# Altium PCB BEAGLEPLAYV020_220915.brd.PcbDoc (part 11 of 12)
Units mil, origin at the board's own origin, x right, y up, seen from the top; angles counter-clockwise.
Board outline 3149.7 x 3149.7 mil, 8 copper layers (TOP, LYR2_GND, LYR3, LAY4_PWR1, LAY5_PWR2, LAY6, LYR7_GND, BOTTOM), stack 60.84 mil thick; 782 components, 546 nets, 2864 pads, 2056 vias.
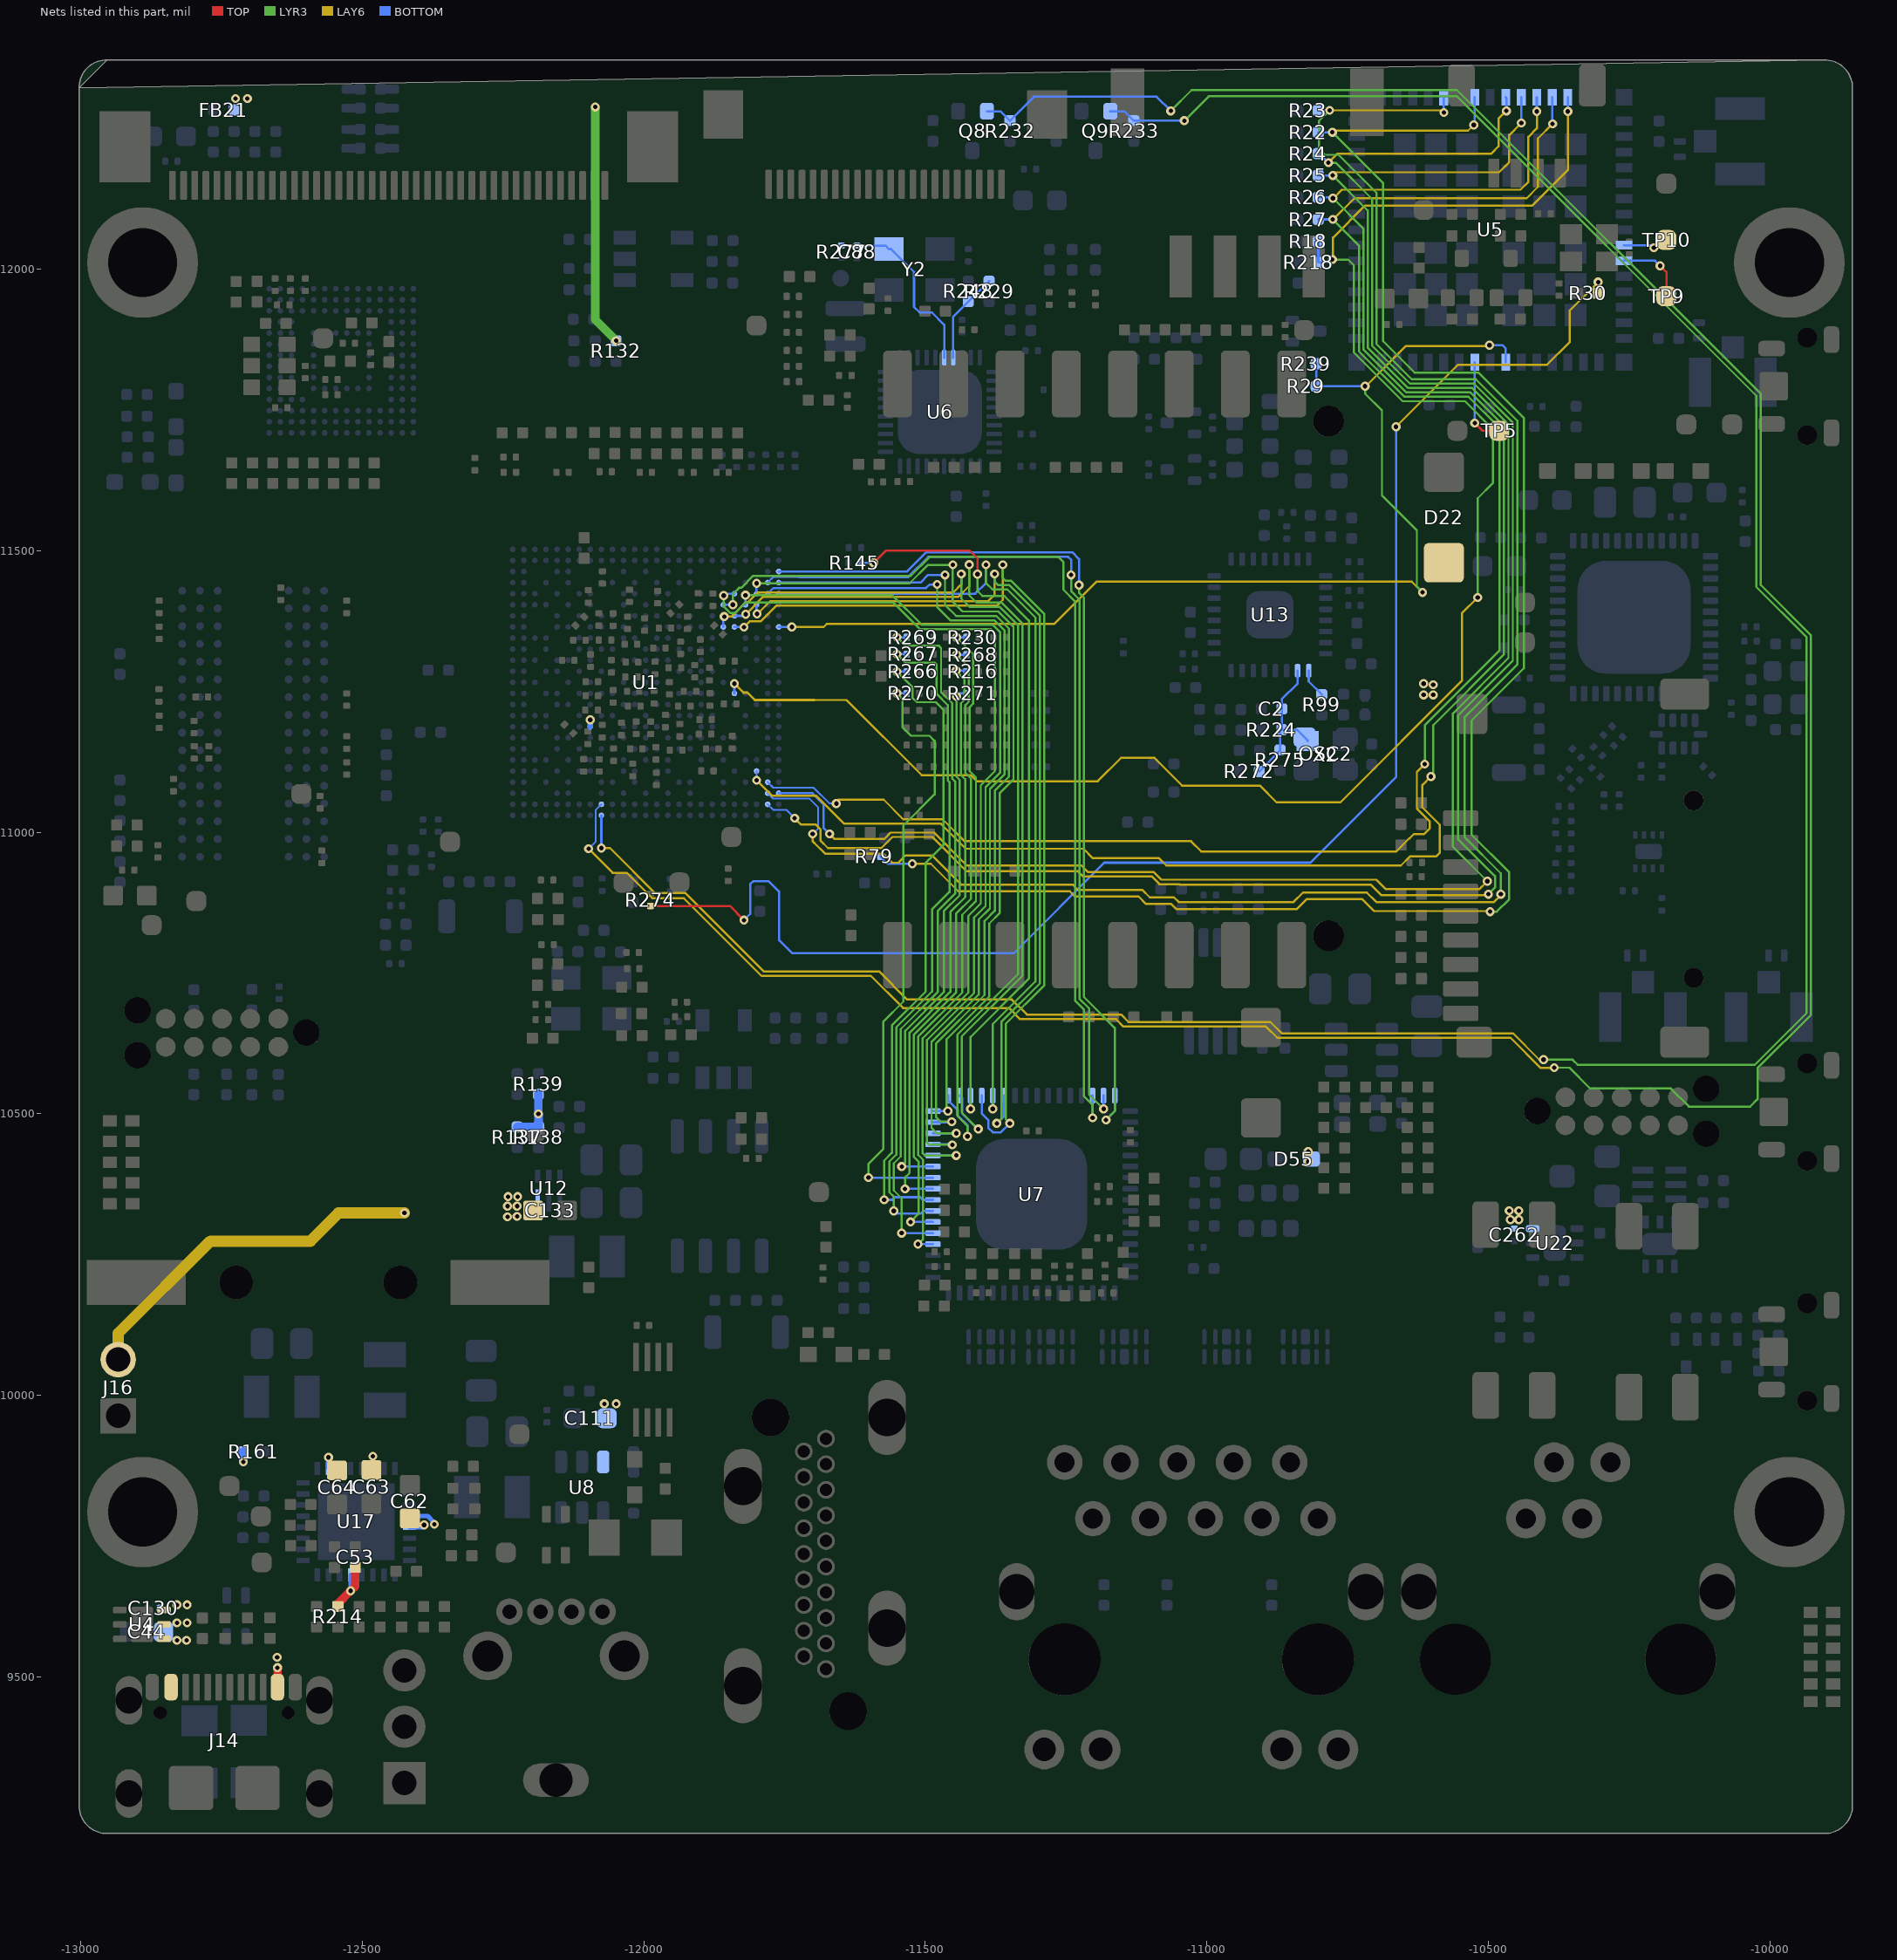
[diagram p17: the nets of this part, all layers, seen from the top]

## Via types
v1: diameter 16/0/16/0/0/0/0/16 (per signal layer), hole 8, TOP to BOTTOM, 334 vias
v2: diameter 16/16/0/0/0/0/16/16 (per signal layer), hole 8, TOP to BOTTOM, 282 vias
v3: diameter 16/0/0/0/0/16/0/16 (per signal layer), hole 8, TOP to BOTTOM, 255 vias
v4: diameter 16/16/0/0/0/16/16/16 (per signal layer), hole 8, TOP to BOTTOM, 253 vias
v5: diameter 16, hole 8, TOP to BOTTOM, 212 vias
v6: diameter 16/16/16/0/0/16/16/16 (per signal layer), hole 8, TOP to BOTTOM, 173 vias
v7: diameter 16/0/0/16/0/0/0/16 (per signal layer), hole 8, TOP to BOTTOM, 131 vias
v8: diameter 16/0/0/0/16/0/0/16 (per signal layer), hole 8, TOP to BOTTOM, 98 vias
v9: diameter 16/16/0/16/0/0/16/16 (per signal layer), hole 8, TOP to BOTTOM, 93 vias
v10: diameter 16/0/16/0/0/16/0/16 (per signal layer), hole 8, TOP to BOTTOM, 87 vias
v11: diameter 16/16/0/16/0/16/16/16 (per signal layer), hole 8, TOP to BOTTOM, 44 vias
v12: diameter 16/16/16/16/0/16/16/16 (per signal layer), hole 8, TOP to BOTTOM, 40 vias
v13: diameter 16/16/16/0/0/0/16/16 (per signal layer), hole 8, TOP to BOTTOM, 19 vias
v14: diameter 16/0/0/16/0/16/0/16 (per signal layer), hole 8, TOP to BOTTOM, 15 vias
v15: diameter 16/0/0/0/16/16/0/16 (per signal layer), hole 8, TOP to BOTTOM, 13 vias
v16: diameter 16/0/16/0/16/0/0/16 (per signal layer), hole 8, TOP to BOTTOM, 3 vias
v17: diameter 16/0/16/16/0/0/0/16 (per signal layer), hole 8, TOP to BOTTOM, 3 vias
v18: diameter 16/16/16/16/0/0/16/16 (per signal layer), hole 8, TOP to BOTTOM, 1 vias

## Nets (pads, with @x,y where several pads share a name; then routed paths per layer and width w, separated by ;. In a path a pad name is that pad's centre, name@x,y a point inside that pad or via, vN(x,y) a via of type N, cw(c..) or ccw(c..) an arc to the next point about the centre after c; other vN are vias at no path point) (continued)
VOUT0_D6: U1.Y23 U7.54 | length 1596.1
  LYR3 w3.8: v10(-11376.9,11458.6) -11376.9,11444.9 -11371.2,11439.2 -11351.38,11439.2 -11296.4,11384.22 -11296.4,10731.88 -11364.8,10663.48 -11364.8,10661.2 -11365,10661 -11365,10491 v1(-11373,10483)
  LAY6 w3.8: -11697,11410.5 -11388.4,11410.5 -11376.9,11422 v10(-11376.9,11458.6)
  LAY6 w4: v3(-11798.91,11387.84) -11797.84,11387.84 -11775.18,11410.5 -11697,11410.5
  BOTTOM w4: U1.Y23@-11799.65,11404 -11799.65,11389.65 -11799,11389 -11799,11387.93 v3(-11798.91,11387.84) ; v1(-11373,10483) -11360.44,10495.56 U7.54@-11360.44,10532.4
VOUT0_D7: U1.AA25 U7.53 | length 1481.3
  LYR3 w3.8: v1(-11392.3,11474.9) -11392.3,11442.7 -11381,11431.4 -11354.62,11431.4 -11304.2,11380.98 -11304.2,10735.12 -11380.13,10659.19 v1(-11380.13,10508.72)
  BOTTOM w4: U1.AA25@-11760.28,11423.68 -11411.32,11423.68 -11392.3,11442.7 v1(-11392.3,11474.9) ; v1(-11380.13,10508.72) U7.53@-11380.13,10532.4
VOUT0_D8: U1.V21 U7.52 | length 1728.6
  LYR3 w3.8: v10(-11362.4,11474.9) -11362.4,11451.66 -11357.74,11447 -11348.14,11447 -11288.6,11387.46 -11288.6,10728.64 -11357,10660.24 -11357,10490 v1(-11350,10483)
  LAY6 w3.8: -11697,11402.7 -11372.3,11402.7 -11362.4,11412.6 v10(-11362.4,11474.9)
  LAY6 w4: v3(-11822.12,11364.32) -11811.8,11374.64 -11792.35,11374.64 -11764.29,11402.7 -11697,11402.7
  BOTTOM w4: U1.V21@-11839.02,11364.62 -11822.63,11364.62 -11822.33,11364.32 v3(-11822.12,11364.32) ; U7.52@-11399.81,10532.4 -11399.81,10500.81 -11388,10489 -11388,10475 -11380,10467 -11366,10467 v1(-11350,10483)
VOUT0_D9: U1.W21 U7.50 | length 1674.4
  LYR3 w3.8: v10(-11422.1,11475.2) -11422.1,11464.68 -11422.2,11464.58 -11422.2,11421.2 -11408.8,11407.8 -11364.4,11407.8 -11327.8,11371.2 -11327.8,10744.9 -11435.2,10637.5 -11435.2,10502.2 v1(-11406,10473)
  LAY6 w3.8: -11697,11418.3 -11441.2,11418.3 -11422.1,11437.4 v10(-11422.1,11475.2)
  LAY6 w4: v3(-11819,11387) -11787.7,11418.3 -11697,11418.3
  BOTTOM w4: U1.W21@-11839.02,11384.31 -11824.69,11384.31 -11822,11387 v3(-11819,11387) ; U7.50@-11439.18,10532.4 -11434.5,10527.72 -11434.5,10500.5 -11409,10475 -11408,10475 v1(-11406,10473)
VOUT0_D10: U1.V20 U7.49 | length 1692.1
  LYR3 w3.8: v10(-11436.1,11458.6) -11436,11458.5 -11436,11415 -11421,11400 -11367.64,11400 -11335.6,11367.96 -11335.6,10748.14 -11443,10640.74 -11443,10496 -11425,10478 v1(-11425,10460)
  LAY6 w3.8: -11697,11426.1 -11449.9,11426.1 -11436.1,11439.9 v10(-11436.1,11458.6)
  LAY6 w4: v3(-11857.1,11382.96) -11844.04,11382.96 -11818.1,11408.9 -11814.36,11408.9 -11797.16,11426.1 -11697,11426.1
  BOTTOM w4: U1.V20@-11858.7,11364.62 -11858.7,11381.36 v3(-11857.1,11382.96) ; U7.49@-11458.87,10532.4 -11458.87,10523.49 -11442.5,10507.12 -11442.5,10497.18 -11425,10479.68 v1(-11425,10460)
VOUT0_D11: U1.AA23 U7.48 | length 1508.7
  LYR3 w3.8: -11697,11442.1 -11528.12,11442.1 -11495.32,11474.9 v1(-11451.1,11474.9) -11451.1,11409.1 -11434.1,11392.1 -11370.78,11392.1 -11343.4,11364.72 -11343.4,11094 -11367.7,11069.7 -11367.7,10856.7 -11386.39,10838.01 -11386.39,10708.39 -11462,10632.78 -11462,10506.82 v1(-11460.02,10504.84)
  LYR3 w4: v1(-11799.65,11442.1) -11697,11442.1
  BOTTOM w4: U1.AA23@-11799.65,11423.68 v1(-11799.65,11442.1) ; U7.48@-11486.43,10504.84 v1(-11460.02,10504.84)
VOUT0_D12: U1.AB25 U7.47 | length 1471.8
  LYR3 w3.8: v1(-11465,11457) -11465,11404 -11445.3,11384.3 -11374.02,11384.3 -11351.2,11361.48 -11351.2,11099 -11376.6,11073.6 -11376.6,10860.6 -11394.91,10842.29 -11394.91,10710.91 -11481.2,10624.62 -11481.2,10494.2 -11473,10486 v1(-11453,10486)
  BOTTOM w4: U1.AB25@-11760.28,11443.36 -11508.64,11443.36 -11495,11457 v1(-11465,11457) ; U7.47@-11486.43,10485.15 -11453.85,10485.15 v1(-11453,10486)
VOUT0_D13: U1.AA24 U7.46 | length 1511.5
  LYR3 w3.8: v1(-11478.9,11440) -11478.9,11399.9 -11455.5,11376.5 -11377.26,11376.5 -11359,11358.24 -11359,11102.96 -11385.2,11076.76 -11385.2,10864.8 -11404.93,10845.07 -11404.93,10711.93 -11489,10627.86 -11489,10475 -11479.47,10465.47 v1(-11445,10465.47)
  BOTTOM w3.2: U1.AA24@-11779.96,11423.68 -11770.08,11433.56 -11722.24,11433.56
  BOTTOM w4: -11722.24,11433.56 -11498.86,11433.56 -11492.42,11440 v1(-11478.9,11440) ; U7.46@-11486.43,10465.47 v1(-11445,10465.47)
VOUT0_D14: U1.Y22 U7.45 | length 1537.9
  LYR3 w3.8: -11697,11420.9 -11558.66,11420.9 -11506.46,11368.7 -11380.5,11368.7 -11366.8,11355 -11366.8,11106.2 -11393,11080 -11393,10869 -11413.45,10848.55 -11413.45,10714.45 -11496.8,10631.1 -11496.8,10448.8 -11493,10445 v1(-11452,10445)
  LYR3 w4: v1(-11819.34,11420.9) -11697,11420.9
  BOTTOM w4: U1.Y22@-11819.34,11404 v1(-11819.34,11420.9) ; U7.45@-11486.43,10445.78 -11458.78,10445.78 -11458,10445 v1(-11452,10445)
VOUT0_D15: U1.AA21 U7.44 | length 1635.9
  LYR3 w3.8: -11697,11407.7 -11556.5,11407.7 -11509.7,11360.9 -11383.74,11360.9 -11376,11353.16 -11376,11109 -11401.5,11083.5 -11401.5,10873.5 -11423.47,10851.53 -11423.47,10715.47 -11504.6,10634.34 -11504.6,10429.9 -11500.8,10426.1 v1(-11445,10426.1)
  LYR3 w4: v1(-11857.97,11420.49) -11857.97,11400.81 -11846.58,11389.42 -11837.58,11389.42 -11819.3,11407.7 -11697,11407.7
  BOTTOM w3.8: v1(-11857.97,11420.49) -11857.51,11420.49 -11854.32,11423.68 U1.AA21@-11839.02,11423.68
  BOTTOM w4: U7.44@-11486.43,10426.1 v1(-11445,10426.1)
VOUT0_D16: R271.2 U7.43 | length 955.3
  LYR3 w3.8: v1(-11541.9,10406.41) -11535.8,10412.51 -11535.8,10647.3 -11467.05,10716.05 -11467.05,10859.95 -11439,10888 -11439,11093.16 -11444.46,11098.62 -11444.46,11238.46 -11444.67,11238.67 v1(-11444.67,11241.33)
  BOTTOM w4: v1(-11541.9,10406.41) U7.43@-11486.43,10406.41 ; v1(-11444.67,11241.33) -11443.67,11241.33 -11438.36,11246.64 R271.2@-11426.96,11246.64
VOUT0_D17: R270.2 U7.42 | length 1087.4
  LYR3 w3.8: v1(-11600.8,10386.73) -11600.8,10411.33 -11574.8,10437.33 -11574.8,10663.5 -11539,10699.3 -11539,11012 -11483.46,11067.54 -11483.46,11162.32 -11492.5,11171.36 -11525.36,11171.36 -11540.8,11186.8 -11540.8,11237.04 v1(-11550.4,11246.64)
  BOTTOM w4: v1(-11600.8,10386.73) U7.42@-11486.43,10386.73 ; v1(-11550.4,11246.64) R270.2@-11532.9,11246.64
VOUT0_D18: R216.2 U7.41 | length 1044.6
  LYR3 w3.8: v1(-11536,10366.81) -11536,10387 -11528,10395 -11528,10644.06 -11455.53,10716.53 -11455.53,10858.47 -11429,10885 -11429,11094.2 -11436.66,11101.86 -11436.66,11229 -11430.56,11235.1 -11430.56,11271.4 -11445,11285.84 v1(-11445,11287)
  BOTTOM w4: v1(-11536,10366.81) -11535.77,10367.04 U7.41@-11486.43,10367.04 ; v1(-11445,11287) -11428.66,11287 R216.2@-11426.96,11285.3
VOUT0_D19: R266.2 U7.40 | length 1143.5
  LYR3 w3.8: v1(-11573,10347.36) -11573,10417.05 -11559.2,10430.85 -11559.2,10657.02 -11499.11,10717.11 -11499.11,10945.89 -11467.86,10977.14 -11467.86,11217.86 -11481,11231 -11515,11231 -11523,11239 -11523,11257.9 v1(-11550.4,11285.3)
  BOTTOM w4: v1(-11573,10347.36) -11558.64,10347.36 -11554,10352 -11509,10352 -11504.36,10347.36 U7.40@-11486.43,10347.36 ; v1(-11550.4,11285.3) R266.2@-11532.9,11285.3
VOUT0_D20: R267.2 U7.39 | length 1196
  LYR3 w3.8: v1(-11555.9,10327.67) -11555.9,10352.86 -11563.8,10360.76 -11563.8,10415.21 -11551.4,10427.61 -11551.4,10653.78 -11488.09,10717.09 -11488.09,10862.91 -11457,10894 -11457,11089.08 -11460.06,11092.14 -11460.06,11226.02 -11480,11245.96 -11480,11297.6 -11483.8,11301.4 -11535.5,11301.4 v1(-11550.4,11316.3)
  BOTTOM w4: v1(-11555.9,10327.67) -11551.23,10323 -11508,10323 -11503.33,10327.67 U7.39@-11486.43,10327.67 ; v1(-11550.4,11316.3) R267.2@-11532.9,11316.3
VOUT0_D21: R268.2 U7.38 | length 1131.5
  LYR3 w3.8: v1(-11526.3,10307.99) -11512,10322.29 -11512,10415.22 -11520.2,10423.42 -11520.2,10640.82 -11445.01,10716.01 -11445.01,10855.99 -11419,10882 -11419,11095.24 -11428.86,11105.1 -11428.86,11225.76 -11422.76,11231.86 -11422.76,11293.6 v1(-11444.46,11315.3)
  BOTTOM w4: v1(-11526.3,10307.99) U7.38@-11486.43,10307.99 ; v1(-11444.46,11315.3) R268.2@-11426.96,11315.3
VOUT0_D22: R269.2 U7.37 | length 1259.6
  LYR3 w3.8: v1(-11550.4,11346.3) -11535.1,11331 -11475.8,11331 -11472,11327.2 -11472,11249 -11452.26,11229.26 -11452.26,11095.38 -11447,11090.12 -11447,10891.04 -11474.85,10863.19 ; v1(-11542,10288.3) -11542,10350 -11556,10364 -11556,10411.97 -11543.6,10424.37 -11543.6,10650.54 -11478.07,10716.07 -11478.07,10859.93 -11474.85,10863.15
  BOTTOM w4: v1(-11550.4,11346.3) R269.2@-11532.9,11346.3 ; v1(-11542,10288.3) U7.37@-11486.43,10288.3
VOUT0_D23: R230.2 U7.36 | length 1190.3
  LYR3 w3.8: v1(-11512.97,10268.82) -11504,10277.79 -11504,10418.26 -11512.4,10426.66 -11512.4,10637.58 -11434.49,10715.49 -11434.49,10853.51 -11410,10878 -11410,11097.28 -11421.06,11108.34 -11421.06,11222.52 -11414.96,11228.62 -11414.96,11316.6 v1(-11444.46,11346.1)
  BOTTOM w4: v1(-11512.97,10268.82) -11512.77,10268.62 U7.36@-11486.43,10268.62 ; v1(-11444.46,11346.1) R230.2@-11426.96,11346.1
VOUT0_DE: U1.Y20 U7.62 | length 1702.2
  LYR3 w3.8: -11697,11455.3 -11526.1,11455.3 -11492.3,11489.1 -11263.7,11489.1 -11255,11480.4 -11255,11431.14 -11234,11410.14 -11234,10701.08 -11218,10685.08 -11218,10531 -11203,10516 ; v1(-11202.96,10493) -11202.96,10516
  LYR3 w4: v1(-11841.8,11404) -11841.8,11423.2 -11830.9,11434.1 -11826.9,11434.1 -11805.7,11455.3 -11697,11455.3
  BOTTOM w4: U1.Y20@-11858.7,11404 v1(-11841.8,11404) ; v1(-11202.96,10493) U7.62@-11202.96,10532.4
VOUT0_HSYNC: U1.AB24 U7.63 | length 1583.2
  LYR3 w3.8: v1(-11241.1,11457) -11241.1,11428.28 -11226.2,11413.38 -11226.2,10704.32 -11209,10687.12 -11209,10534 -11183.72,10508.72 v1(-11183.28,10508.72)
  BOTTOM w3.2: U1.AB24@-11779.96,11443.36 -11770.07,11453.25 -11724,11453.25
  BOTTOM w4: -11724,11453.25 -11530.75,11453.25 -11494.8,11489.2 -11246.3,11489.2 -11241.1,11484 v1(-11241.1,11457) ; v1(-11183.28,10508.72) U7.63@-11183.28,10532.4
VOUT0_PCLK: R145.1 U7.51 | length 1326.9
  TOP w3.8: -11421,11500 -11407.2,11486.2 -11407.2,11458.5 v1(-11407.3,11458.4)
  TOP w4: v5(-11591.44,11478.56) -11570,11500 -11421,11500
  LYR3 w3.8: v1(-11419.5,10508.72) -11419.5,10636.51 -11316,10740.01 -11316,11376.09 -11359.51,11419.6 -11398.6,11419.6 -11407.3,11428.3 v1(-11407.3,11458.4)
  BOTTOM w4: R145.1@-11614.76,11478.56 v5(-11591.44,11478.56) ; v1(-11419.5,10508.72) U7.51@-11419.5,10532.4
VOUT0_VSYNC: U1.AC25 U7.64 | length 1630.9
  LYR3 w3.8: v1(-11227,11439) -11227,11425.22 -11218.4,11416.62 -11218.4,10707.56 -11163.59,10652.75 -11163.59,10504.41 v1(-11179,10489)
  BOTTOM w4: U1.AC25@-11760.28,11463.05 -11532.27,11463.05 -11498.12,11497.2 -11239.2,11497.2 -11227,11485 v1(-11227,11439) ; v1(-11179,10489) -11170.81,10497.19 -11170.81,10497.62 -11163.59,10504.84 U7.64@-11163.59,10532.4
VPP_1V8: J16.2 U1.J8 | length 655.7
  LAY6 w20: J16.2@-12933.34,10063.66 -12933.34,10110.16 -12769.5,10274 -12592,10274 -12542,10324 v10(-12425,10324)
  BOTTOM w10: U1.J8@-12094.92,11187.46 v1(-12094.92,11199.7)
VSYS_5V: C44.1 C53.1 C62.1 C63.1 C64.1 C111.1 C130.1 C133.1 C262.1 D22.1 D55.1 FB21.1 J14.B4 J14.B9 R132.2 R137.1 R138.1 R139.1 R161.1 R214.1 U4.4 U4.5 U4.6 U8.3 U12.6 U17.4 U17.5 U17.13 U17.26 U17.30 U22.6 | length 811.6
  TOP w15: J14.B4@-12650.51,9481.97 v7(-12650.51,9516.51) ; R214.1@-12543.14,9625.13 -12543.14,9630.39 v7(-12520.53,9653) -12512.34,9661.19 C53.1@-12512.34,9694.63
  LYR3 w15: v17(-12086,12288) -12086,11910 -12049.13,11873.13 v1(-12049.13,11872.83)
  BOTTOM w8: U17.26@-12559.9,9870.29 v7(-12559.9,9889.9) ; v7(-12520.53,9653) U17.13@-12520.53,9681.31 ; U17.30@-12481.16,9870.29 v7(-12481.16,9892) ; U17.5@-12416.2,9765.96 -12394.04,9765.96 v7(-12390,9770) ; U17.4@-12416.2,9785.64 -12383.71,9785.64 -12372,9773.93 v7(-12372,9771)
  BOTTOM w15: v7(-12711.21,9881.79) R161.1@-12711.21,9900 ; R137.1@-12224.86,10476.65 -12224.82,10476.61 R138.1@-12186.86,10476.61 -12186.86,10499.72 v7(-12187.14,10500) R139.1@-12187.14,10535.09
  other v7: -12651,9535 -12829,9565 -12812,9565 -12829,9596 -12811,9596 -12829,9628 -12811,9628 -12070,9985 -12049,9985 -10461,10312 -10446,10312 -12242,10317 -12225,10318 -10463,10328 -10446,10328 -12242,10336 -12225,10336 -12241,10353 -12224,10353 -10820,10415 -10820,10433 -10615,11244 -10598,11244 -10598,11262 -10615,11264 -12725,12303 -12704,12303
WKUP_CLKOUT0: R30.1 R274.2 | length 2767.1
  TOP w4: R274.2@-11988,10869 -11847,10869 v5(-11822,10844) ; R30.1@-10304.99,11957 v3(-10304.99,11977.01)
  LAY6 w3.8: v3(-10664,11720) -10554,11830 -10396,11830 -10355.9,11870.1 -10355.9,11926.1 v3(-10304.99,11977.01)
  BOTTOM w4: v5(-11822,10844) -11811,10855 -11811,10905.06 -11810.85,10905.21 -11810.84,10907.82 -11805.58,10913.06 -11781.79,10913.06 -11778.05,10913.05 -11760,10895 -11760,10809 -11736,10785 -11343,10785 -11182,10946 -10816,10946 -10664,11098 v3(-10664,11720)
WKUP_I2C0_SCL: Q8.2 R232.2 U1.B9 | length 5336.5
  LYR3 w3.8: v1(-11064,12281) -11027,12318 -10555.92,12318 -10016.2,11778.28 -10016.2,11438.96 -9926.99,11349.75 -9926.99,10675.97 -10022,10580.96 -10022,10526 -10035,10513 -10144,10513 -10176,10545 -10319.08,10545 -10356.08,10582 v10(-10383,10582)
  LAY6 w3.8: v3(-12098,10970.7) -12055.3,10928 -12030,10928 -11984.8,10882.8 -11928.8,10882.8 -11791,10745 -11596.63,10745 -11539.43,10687.8 -11351.41,10687.8 -11331.61,10668 -11161,10668 -11148,10655 -10895,10655 -10875.2,10635.2 -10460.86,10635.2 -10407.16,10581.5 -10383.5,10581.5 v10(-10383,10582)
  BOTTOM w3.2: v3(-12098,10970.7) -12085.04,10983.66 -12085.04,11039.86 U1.B9@-12075.24,11049.66
  BOTTOM w4: Q8.2@-11390.48,12280.34 -11366.29,12280.34 R232.2@-11349.5,12263.55 -11307,12306.05 -11089.05,12306.05 v1(-11064,12281)
WKUP_I2C0_SDA: Q9.2 R233.2 U1.A9 | length 4921.6
  LYR3 w3.8: v1(-11040,12263.55) -10996.55,12307 -10555.96,12307 -10024,11775.04 -10024,11435.72 -9934.79,11346.51 -9934.79,10679.21 -10026.98,10587.02 -10341.44,10587.02 -10350.45,10596.03 -10401.63,10596.03 v10(-10402,10596.4)
  LAY6 w3.8: v3(-12075.24,10972) -12060,10972 -11980,10892 -11926,10892 -11787,10753 -11582,10753 -11532.1,10703.1 -11346.33,10703.1 -11319.62,10676.39 -11152.39,10676.39 -11139,10663 -10887,10663 -10867,10643 -10456.29,10643 -10409.69,10596.4 v10(-10402,10596.4)
  BOTTOM w4: v3(-12075.24,10972) U1.A9@-12075.24,11029.98 ; Q9.2@-11171.48,12280.34 -11146.29,12280.34 R233.2@-11129.5,12263.55 v1(-11040,12263.55)
WL_CLK: R22.1 R79.2 U5.8 | length 3148.3
  LYR3 w3.8: v10(-10777.02,12243.02) -10686.83,12152.83 -10686.83,11871.92 -10631.28,11816.37 -10517.52,11816.37 -10437,11735.87 -10437,11291 -10530,11198 -10530,10996 -10463,10929 -10463,10881 -10485,10859 v10(-10497,10859)
  LAY6 w3.8: v3(-11523,10944) -11490.16,10944 -11441.36,10895.2 -11243.2,10895.2 -11234,10886 -11121.11,10886 -11107.71,10872.6 -11063.29,10872.6 -11054.49,10863.8 -10840.2,10863.8 -10822.8,10881.2 -10724,10881.2 -10702.8,10860 -10498,10860 v10(-10497,10859) ; v10(-10777.02,12243.02) -10774.04,12246 -10536,12246 v3(-10526,12256)
  BOTTOM w3.8: R79.2@-11580,10956.95 -11567.05,10944 v3(-11523,10944)
  BOTTOM w4: R22.1@-10802.09,12243.02 v10(-10777.02,12243.02) ; v3(-10526,12256) -10524.2,12257.8 U5.8@-10524.2,12305.24
WL_CMD: R23.2 U1.C24 U5.6 | length 3406.7
  LYR3 w3.8: v10(-10782,12282) -10801,12263 -10801,12214 -10790,12203 -10766,12203 -10698.63,12135.63 -10698.63,11867.03 -10636.17,11804.57 -10522.41,11804.57 -10448.8,11730.96 -10448.8,11297.86 -10542,11204.66 -10542,10991 -10478,10927 v10(-10478,10890)
  LAY6 w3.8: -11697,10981 -11678,10962 -11575,10962 -11559,10946 -11548,10946 -11535,10959 -11488.47,10959 -11436.47,10907 -11238.31,10907 -11229.11,10897.8 -11114.8,10897.8 -11101.4,10884.4 -11058.4,10884.4 -11050,10876 -10846,10876 -10829,10893 -10716,10893 -10699.03,10876.03 -10489.96,10876.03 -10478,10887.99 v10(-10478,10890) ; v10(-10782,12282) -10583,12282 v3(-10579,12278)
  LAY6 w4: v3(-11700,10997) -11700,10984 -11697,10981
  BOTTOM w3.2: U1.C24@-11779.96,11069.35 -11770.16,11059.55 -11705.55,11059.55 -11690.2,11044.2 -11690.2,11006.8 v3(-11700,10997)
  BOTTOM w4: R23.2@-10802.09,12281.8 -10782.2,12281.8 v10(-10782,12282) ; U5.6@-10579.32,12305.24 -10579.32,12278.32 v3(-10579,12278)
WL_D0: R24.2 U1.B24 U5.10 | length 3389.5
  LYR3 w3.8: v10(-10784,12189) -10771,12189 -10706.43,12124.43 -10706.43,11863.79 -10639.41,11796.77 -10525.65,11796.77 -10456.6,11727.72 -10456.6,11304.4 -10554,11207 -10554,10988 -10488.1,10922.1 -10488.1,10901.9 v10(-10500,10890)
  LAY6 w3.8: -11697,11014 -11695,11014 -11686,11005 -11686,10985 -11673,10972 -11578,10972 -11558.34,10991.66 -11487.75,10991.66 -11426.69,10930.6 -11228.53,10930.6 -11219.33,10921.4 -11097.4,10921.4 -11084,10908 -11048.62,10908 -11047.62,10907 -10709,10907 -10690,10888 -10502,10888 v10(-10500,10890) ; v10(-10784,12189) -10767.84,12205.16 -10494.84,12205.16 -10482,12218 -10482,12267 v3(-10468,12281)
  LAY6 w4: v3(-11732,11025) -11721,11014 -11697,11014
  BOTTOM w3.2: U1.B24@-11779.96,11049.66 -11770.16,11039.86 -11746.86,11039.86 v3(-11732,11025)
  BOTTOM w4: R24.2@-10802.09,12205.16 -10800.16,12205.16 v10(-10784,12189) ; U5.10@-10469.08,12305.24 -10468,12304.16 v3(-10468,12281)
WL_D1: R25.2 U1.C25 U5.11 | length 3357.1
  LYR3 w3.8: v10(-10776.34,12166.34) -10714.23,12104.23 -10714.23,11860.55 -10642.48,11788.8 -10528.72,11788.8 -10464.4,11724.48 -10464.4,11309.6 -10563,11211 -10563,10974 v10(-10502,10913)
  LAY6 w3.8: v3(-11670,10997) -11661,10988 -11573.04,10988 -11561.58,10999.46 -11484.51,10999.46 -11426.05,10941 -11222.69,10941 -11210.89,10929.2 -11094.16,10929.2 -11080.76,10915.8 -10698.8,10915.8 -10682,10899 -10516,10899 v10(-10502,10913) ; v10(-10776.34,12166.34) -10770.68,12172 -10481,12172 -10463,12190 -10463,12238.04 v3(-10441.52,12259.52)
  BOTTOM w4: U1.C25@-11760.28,11069.35 -11700.35,11069.35 -11681,11050 -11681,11008 v3(-11670,10997) ; R25.2@-10802.09,12166.34 v10(-10776.34,12166.34) ; v3(-10441.52,12259.52) U5.11@-10441.52,12305.24
WL_D2: R26.2 U1.E23 U5.12 | length 3272
  LYR3 w3.8: v10(-10776,12126) -10722.03,12072.03 -10722.03,11857.31 -10645.72,11781 -10531.96,11781 -10472.2,11721.24 -10472.2,11316 -10598,11190.2 -10598,11103 v10(-10602,11099)
  LAY6 w3.8: -11694,11065 -11644,11015 -11592.04,11015 -11591.78,11015.26 -11472.58,11015.26 -11428.12,10970.8 -11219.11,10970.8 -11202.31,10954 -11085,10954 -11072,10941 -10655.31,10941 -10639.31,10957 -10593,10957 -10586,10964 -10586,11013 -10617,11044 -10617,11084 v10(-10602,11099) ; v10(-10776,12126) -10775,12126 -10760,12141 -10443,12141 -10429,12155 -10429,12235 -10413.96,12250.04 v3(-10413.96,12280)
  LAY6 w4: v3(-11799.65,11092.35) -11772.3,11065 -11694,11065
  BOTTOM w3.2: v3(-11799.65,11092.35) U1.E23@-11799.65,11108.72
  BOTTOM w4: R26.2@-10802.09,12127.52 -10777.52,12127.52 v10(-10776,12126) ; v3(-10413.96,12280) U5.12@-10413.96,12305.24
WL_D3: R27.2 U1.D24 U5.13 | length 3176.7
  LYR3 w3.8: v10(-10776.3,12088.3) -10729.83,12041.83 -10729.83,11854.07 -10648.96,11773.2 -10535.2,11773.2 -10480,11718 -10480,11323 -10613,11190 v10(-10613,11121)
  LAY6 w3.8: v3(-11658,11051) -11658,11054.1 -11654.2,11057.9 -11573.9,11057.9 -11539.06,11023.06 -11469.34,11023.06 -11430.28,10984 -11028,10984 -11010,10966 -10663.69,10966 -10640.75,10988.94 -10640.06,10988.94 -10632,10997 -10614,10997 -10604,11007 -10604,11019 -10627,11042 -10627,11107 v10(-10613,11121) ; v10(-10776.3,12088.3) -10775.7,12088.3 -10738,12126 -10432,12126 -10412,12146 -10412,12232 v3(-10386,12258)
  BOTTOM w3.2: U1.D24@-11779.96,11089.04 -11770.16,11079.24 -11698.24,11079.24 -11670,11051 v3(-11658,11051)
  BOTTOM w4: R27.2@-10802.09,12088.3 v10(-10776.3,12088.3) ; U5.13@-10386.4,12305.24 -10386.4,12258.4 v3(-10386,12258)
WL_EN: R29.1 R239.1 U1.V25 U5.40 | length 2026.4
  LYR3 w3.8: v10(-10719,11792) -10719,11779 -10689,11749 -10689,11598 -10627,11536 -10627,11436 v10(-10617,11426)
  LAY6 w3.8: -11697,11364.62 -11680.42,11364.62 -11675.29,11369.75 -11271.25,11369.75 -11196,11445 -10636,11445 v10(-10617,11426) ; v10(-10719,11792) -10718,11792 -10646.9,11863.1 -10499.9,11863.1 v3(-10498,11865)
  LAY6 w4: v3(-11737,11364.62) -11697,11364.62
  BOTTOM w4: U1.V25@-11760.28,11364.62 v3(-11737,11364.62) ; R239.1@-10805.79,11832 R29.1@-10805.79,11792 v10(-10719,11792) ; v3(-10498,11865) -10475,11865 -10469.08,11859.08 U5.40@-10469.08,11834.76
WL_IRQ: R18.1 R218.1 U1.M21 U5.14 | length 3190.1
  LYR3 w3.8: v10(-10777,12017) -10748.99,12017 -10739,12007.01 -10739,11852.2 -10652.2,11765.4 -10541.4,11765.4 -10492,11716 -10492,11620 -10519,11593 v10(-10519,11417)
  LAY6 w3.8: -11697,11234.9 -11640.9,11234.9 -11640.8,11234.8 -11639.8,11234.8 -11506.46,11101.46 -11419.15,11101.46 -11408.35,11090.66 -11193.85,11090.66 -11152.31,11132.2 -11093.2,11132.2 -11044,11083 -10906,11083 -10876.2,11053.2 -10762.8,11053.2 -10547,11269 -10547,11389 v10(-10519,11417) ; v10(-10777,12017) -10776,12018 -10776,12056 -10719,12113 -10422,12113 -10358.84,12176.16 v3(-10358.84,12280)
  LAY6 w4: v3(-11839.02,11263.98) -11823.04,11248 -11816.01,11248 -11802.91,11234.9 -11697,11234.9
  BOTTOM w4: U1.M21@-11839.02,11246.52 v3(-11839.02,11263.98) ; R18.1@-10802.09,12049 -10802.09,12012.45 R218.1@-10801.58,12011.94 -10782.06,12011.94 v10(-10777,12017) ; v3(-10358.84,12280) U5.14@-10358.84,12305.24
WL_UART_DBG: TP5.1 U5.42 | length 156.9
  TOP w4: v5(-10524.2,11726.8) -10510.4,11713 TP5.1@-10481,11713
  BOTTOM w4: v5(-10524.2,11726.8) U5.42@-10524.2,11834.76
WLAN_RS232_RX: TP10.1 U5.26 | length 83.5
  TOP w4: v5(-10206,12038) -10203,12038 -10195,12046 -10189.72,12046 TP10.1@-10183.83,12051.89
  BOTTOM w4: U5.26@-10259.44,12042.44 -10210,12042.44 -10206,12038.44 v5(-10206,12038)
WLAN_RS232_TX: TP9.1 U5.27 | length 126.9
  TOP w4: v5(-10195,12006) -10183.83,11994.83 TP9.1@-10183.83,11951.89
  BOTTOM w4: U5.27@-10259.44,12014.88 -10203.88,12014.88 v5(-10195,12006)
XI: C2.1 OSC2.3 R224.2 R272.1 R275.1 U13.10 X2.3 | length 261.9
  BOTTOM w4: R272.1@-10906.79,11108 -10870.08,11144.71 R275.1@-10870.08,11146.21 -10870.08,11178.93 R224.2@-10866.87,11182.14 ; U13.10@-10838.75,11287 -10838.75,11264.25 -10866.87,11236.13 C2.1@-10866.87,11219.14 R224.2@-10866.87,11182.14 ; X2.3@-10821.15,11162.07 -10821.15,11163.28 OSC2.3@-10826.4,11168.53 -10840.01,11182.14 R224.2@-10866.87,11182.14
XO: R99.1 U13.9 | length 52
  BOTTOM w4: U13.9@-10819.05,11287 -10819.05,11267.8 R99.1@-10795.86,11244.61
XTAL_IN: C88.1 R277.1 U6.36 Y2.1 | length 335.7
  BOTTOM w4: R277.1@-11649,12042 -11648.62,12041.62 C88.1@-11621.27,12041.62 -11570.53,12041.62 Y2.1@-11564.66,12035.75 -11560.74,12035.75 -11520,11995.01 -11520,11933 -11510,11923 -11488,11923 -11466.26,11901.26 U6.36@-11466.26,11842.88
XTAL_OUT: R229.2 R248.2 U6.37 | length 162.9
  BOTTOM w4: U6.37@-11450.51,11842.88 -11450.97,11843.34 -11450.97,11914.97 R248.2@-11423.53,11942.41 ; R248.2@-11423.53,11942.47 R248.2@-11423.53,11942.41 ; R229.2@-11386.73,11978.59 -11422.91,11942.41 R248.2@-11423.53,11942.41
pads on no net: J1. J2. J2.2 J2.5 J4. J4.14 J10. J11. J11.7 J11.9 J14. J14.A8 J14.B8 J19. J21. J24. J24.10 MH3.1 MH4.1 SW1. SW2. SW3. U1.A2 U1.A4 U1.A5 U1.A7 U1.A14 U1.AA12 U1.AC20 U1.AD21 U1.AE2 U1.B1 U1.B3 U1.B4 U1.B5 U1.B13 U1.B23 U1.C5 U1.C6 U1.C9 U1.C20 U1.D6 U1.D9 U1.E7 U1.E8 U1.F6 U1.J3 U1.J4 U1.K2 U1.N2 U1.T2 U1.U4 U1.Y15 U3.A1 U3.A2 U3.A7 U3.A8 U3.A9 U3.A10 U3.A11 U3.A12 U3.A13 U3.A14 U3.B1 U3.B7 U3.B8 U3.B9 U3.B10 U3.B11 U3.B12 U3.B13 U3.B14 U3.C1 U3.C3 U3.C5 U3.C7 U3.C8 U3.C9 U3.C10 U3.C11 U3.C12 U3.C13 U3.C14 U3.D1 U3.D2 U3.D3 U3.D4 U3.D12 U3.D13 U3.D14 U3.E1 U3.E2 U3.E3 U3.E5 U3.E8 U3.E9 U3.E10 U3.E12 U3.E13 U3.E14 U3.F1 U3.F2 U3.F3 U3.F10 U3.F12 U3.F13 U3.F14 U3.G1 U3.G2 U3.G3 U3.G10 U3.G12 U3.G13 U3.G14 U3.H1 U3.H2 U3.H3 U3.H12 U3.H13 U3.H14 U3.J1 U3.J2 U3.J3 U3.J12 U3.J13 U3.J14 U3.K1 U3.K2 U3.K3 U3.K6 U3.K7 U3.K10 U3.K12 U3.K13 U3.K14 U3.L1 U3.L2 U3.L3 U3.L12 U3.L13 U3.L14 U3.M1 U3.M2 U3.M3 U3.M7 U3.M8 U3.M9 U3.M10 U3.M11 U3.M12 U3.M13 U3.M14 U3.N1 U3.N3 U3.N6 U3.N7 U3.N8 U3.N9 U3.N10 U3.N11 U3.N12 U3.N13 U3.N14 U3.P1 U3.P2 U3.P7 U3.P8 U3.P9 U3.P10 U3.P11 U3.P12 U3.P13 U3.P14 U5.3 U5.4 U5.5 U5.21 U5.25 U5.50 U5.51 U5.52 U5.53 U5.56 U5.58 U5.60 U5.62 U9.10 U9.11 U9.12 U9.14 U9.15 U9.16 U9.17 U9.20 U9.28 U9.29 U9.30 U9.31 U9.32 U9.36 U9.37 U9.38 U9.39 U13.2 U13.13 U13.22 U13.26 U13.27 U15.2 U15.5 U17.8 U21.4

## Polygon pours and split planes (outlines as drawn)
GND on LYR2_GND "LYR2_GND-GND" (solid, pour order 73): -10105,9810 -10087,9828 -10087,9871 -10094,9878 -10219,9878 -10239,9858 -10239,9830 -10219,9810
no net on LYR2_GND "LYR2_GND-No Net" (solid, pour order 145): 117 vertices, not listed, extent -12974,9283 -9864,12355
GND_EARTH on LYR2_GND "LYR2_GND-GND_EARTH" (solid, pour order 130): 68 vertices, not listed, extent -12990,9233 -9890,9850
VDD_3V3 on BOTTOM "BOTTOM-VDD_3V3" (solid, pour order 26): -10532,11514 -10532,11580 -10520,11592 -10480,11592 -10472,11584 -10472,11551 -10495,11551 -10501,11545 -10501,11513 -10504,11510 -10528,11510
VDD_CORE on BOTTOM "BOTTOM-VDD_CORE" (solid, pour order 79): -12245,9799 -12245,9962 -12233,9974 -12199,9974 -12190,9965 -12190,9797 -12204,9783 -12229,9783
GND on BOTTOM "BOTTOM-GND" (solid, pour order 72): -12080,10449 -12109,10449 -12137,10421 -12137,10370 -12142,10365 -12149,10365 -12152,10362 -12152,10322 -12133,10303 -12081,10303 -12073,10311 -12073,10442
VDD_3V3 on BOTTOM "BOTTOM-VDD_3V3 1" (solid, pour order 36): -11327,12100 -11359,12100 -11371,12112 -11371,12182 -11363,12190 -11327,12190 -11320,12183 -11320,12107
VSYS_5V on BOTTOM "BOTTOM-VSYS_5V" (solid, pour order 23): -12190,10362 -12239,10362 -12251,10350 -12251,10314 -12244,10307 -12204,10307 -12185,10326 -12185,10357
N16034849 on BOTTOM "BOTTOM-N16034849" (solid, pour order 59): -12167,10360 -12170,10360 -12172,10358 -12172,10325 -12174,10323 -12177,10323 -12195,10305 -12195,10220 -12182,10207 -12138,10207 -12124,10221 -12124,10283 -12165,10324 -12165,10358
VDD_1V2 on BOTTOM "BOTTOM-VDD_1V2" (solid, pour order 33): -12366,11004 -12454,11004 -12465,10993 -12465,10970 -12455,10960 -12390,10960 -12387,10957 -12373,10957 -12367,10963 -12367,10971 -12367,10985 -12361,10991 -12361,10999
VDD_1V0 on BOTTOM "BOTTOM-VDD_1V0" (solid, pour order 58): -11940,11992 -11880,11992 -11869,11981 -11869,11963 -11861,11955 -11818,11955 -11798,11955 -11792,11949 -11792,11924 -11799,11917 -11886,11917 -11916,11947 -11936,11947 -11948,11959 -11948,11984
GND on BOTTOM "BOTTOM-GND 1" (solid, pour order 52): -12437,10912 -12445,10912 -12458,10925 -12458,10936 -12450,10944 -12372,10944 -12366,10938 -12366,10921 -12387,10900 -12387,10841 -12387,10834 -12395,10826 -12426,10826 -12433,10833 -12433,10908
VDD_3V3_SD on BOTTOM "BOTTOM-VDD_3V3_SD" (solid, pour order 74): 22 vertices, not listed, extent -10819,10603 -10750,10780
GND on BOTTOM "BOTTOM-GND 2" (solid, pour order 100): -12540,10061 -12614,10061 -12628,10075 -12628,10122 -12654,10148 -12654,10233 -12639,10248 -12548,10248 -12535,10235 -12535,10150 -12535,10066
N16846143 on BOTTOM "BOTTOM-N16846143" (solid, pour order 60): -12832,12193 -12832,12303 -12815,12320 -12762,12320 -12756,12314 -12756,12275 -12763,12268 -12777,12268 -12787,12258 -12787,12200 -12804,12183 -12822,12183
VSYS_5V on BOTTOM "BOTTOM-VSYS_5V 1" (solid, pour order 46): -12081,9873 -12081,9991 -12074,9998 -12032,9998 -12022,9988 -12022,9933 -12058,9897 -12058,9873 -12065,9866 -12074,9866
GND on BOTTOM "BOTTOM-GND 3" (solid, pour order 35): -10464,11419 -10528,11419 -10543,11434 -10543,11480 -10532,11491 -10499,11491 -10491,11483 -10491,11454 -10483,11446 -10469,11446 -10461,11438 -10461,11422
VDD_1V2 on BOTTOM "BOTTOM-VDD_1V2 1" (solid, pour order 97): -12672,9956 -12723,9956 -12755,9988 -12763,9996 -12763,10107 -12763,10132 -12753,10142 -12699,10142 -12676,10119 -12658,10101 -12658,9970
VDDA_0V85 on BOTTOM "BOTTOM-VDDA_0V85" (solid, pour order 13): -12601,9750 -12619,9750 -12625,9756 -12679,9756 -12685,9750 -12685,9721 -12677,9713 -12647,9713 -12618,9742 -12601,9742 -12598,9745 -12598,9747
GND on BOTTOM "BOTTOM-GND 4" (solid, pour order 143): 79 vertices, not listed, extent -12974,9283 -9877,12355
VDD_3V3 on BOTTOM "BOTTOM-VDD_3V3 2" (solid, pour order 75): 17 vertices, not listed, extent -10700,10640 -10579,10748
N15997644 on BOTTOM "BOTTOM-N15997644" (solid, pour order 83): 17 vertices, not listed, extent -12619,9862 -12529,10035
VDD_1V8 on BOTTOM "BOTTOM-VDD_1V8" (solid, pour order 0): -12129,11973 -12149,11973 -12158,11964 -12158,11941 -12150,11933 -12128,11933 -12123,11938 -12123,11967
GND on BOTTOM "BOTTOM-GND 5" (solid, pour order 111): 30 vertices, not listed, extent -12949,9399 -12604,9657
MCU_3V3 on BOTTOM "BOTTOM-MCU_3V3" (solid, pour order 39): 19 vertices, not listed, extent -10489,11424 -10366,11535
VDD_1V8 on BOTTOM "BOTTOM-VDD_1V8 1" (solid, pour order 103): -12295,10167 -12479,10167 -12499,10147 -12499,10068 -12483,10052 -12274,10052 -12261,10065 -12261,10133 -12261,10150 -12278,10167
REGOUT on BOTTOM "BOTTOM-REGOUT" (solid, pour order 28): -11566,11815 -11636,11815 -11666,11845 -11666,11864 -11661,11869 -11613,11869 -11564,11820 -11564,11817
GND_EARTH on BOTTOM "BOTTOM-GND_EARTH" (solid, pour order 133): 66 vertices, not listed, extent -12990,9233 -9890,9894
GND on BOTTOM "BOTTOM-GND 6" (solid, pour order 48): 17 vertices, not listed, extent -12173,11987 -11957,12036
VSYS_5V on BOTTOM "BOTTOM-VSYS_5V 2" (solid, pour order 20): -10468,10290 -10412,10290 -10409,10293 -10409,10318 -10430,10339 -10469,10339 -10476,10332 -10476,10298
N15998811 on BOTTOM "BOTTOM-N15998811" (solid, pour order 84): 17 vertices, not listed, extent -12515,9859 -12385,10005
USB_A_5V on BOTTOM "BOTTOM-USB_A_5V" (solid, pour order 29): -12037,9807 -12069,9807 -12079,9797 -12079,9755 -12071,9747 -12016,9747 -12005,9758 -12005,9796 -12008,9799 -12029,9799
N15997187 on BOTTOM "BOTTOM-N15997187" (solid, pour order 56): 27 vertices, not listed, extent -12426,9780 -12290,9857
GND on BOTTOM "BOTTOM-GND 7" (solid, pour order 3): -11809,11996 -11845,11996 -11852,11989 -11852,11970 -11844,11962 -11805,11962 -11800,11967 -11800,11987
GND on BOTTOM "BOTTOM-GND 8" (solid, pour order 81): -12200,10026 -12325,10026 -12338,10013 -12338,9911 -12330,9903 -12287,9903 -12277,9913 -12277,9956 -12248,9985 -12201,9985 -12191,9995 -12191,10017
N15956717 on BOTTOM "BOTTOM-N15956717" (solid, pour order 24): -10187.4,11515 -10187.4,11541.4 -10198,11552 -10198,11608 -10203,11613 -10232,11613 -10243,11602 -10243,11551 -10234,11542 -10206,11542 -10198,11534 -10198,11515
VDD_1V8 on BOTTOM "BOTTOM-VDD_1V8 2" (solid, pour order 1): -10313,11774 -10356,11774 -10360,11770 -10360,11754 -10349,11743 -10315,11743 -10309,11749 -10309,11770
GND on BOTTOM "BOTTOM-GND 9" (solid, pour order 32): -12728,9742 -12728,9863 -12721,9870 -12705,9870 -12700,9865 -12700,9744 -12700,9718 -12704,9714 -12724,9714 -12728,9718
GND on BOTTOM "BOTTOM-GND 10" (solid, pour order 65): -11190,12091 -11190,12173 -11291,12173 -11291,12091
VDDRF on BOTTOM "BOTTOM-VDDRF" (solid, pour order 67): -10387,11607 -10387,11565 -10381,11559 -10271,11559 -10267,11563 -10267,11609 -10267,11626 -10272,11631 -10382,11631 -10387,11626
N8505525 on BOTTOM "BOTTOM-N8505525" (solid, pour order 49): 19 vertices, not listed, extent -10421,11691 -10332,11847
PO_5V on BOTTOM "BOTTOM-PO_5V" (solid, pour order 66): 33 vertices, not listed, extent -10312,10303 -10164,10400
VDD_3V3 on BOTTOM "BOTTOM-VDD_3V3 3" (solid, pour order 102): -11988,10206 -12057,10206 -12074,10223 -12074,10273 -12041,10306 -12041,10461 -12041,10480 -12034,10487 -11978,10487 -11971,10480 -11971,10459 -11971,10223
VDD_2V5 on BOTTOM "BOTTOM-VDD_2V5" (solid, pour order 18): 18 vertices, not listed, extent -12683,9809 -12597,9865
VSYS_5V on BOTTOM "BOTTOM-VSYS_5V 3" (solid, pour order 44): -12811,9644 -12855,9644 -12865,9634 -12865,9562 -12853,9550 -12811,9550 -12801,9560 -12801,9634
VSYS_5V on BOTTOM "BOTTOM-VSYS_5V 4" (solid, pour order 2): -12735,12282 -12735,12306 -12727,12314 -12697,12314 -12691,12308 -12691,12281 -12697,12275 -12728,12275
N16222390 on BOTTOM "BOTTOM-N16222390" (solid, pour order 55): -10352,10290 -10327,10290 -10318,10299 -10318,10399 -10331,10412 -10390,10412 -10398,10404 -10398,10371 -10355,10328 -10355,10293
N8504621 on BOTTOM "BOTTOM-N8504621" (solid, pour order 6): -10669,11830 -10669,11877 -10660,11886 -10634,11886 -10626,11878 -10626,11855 -10629,11852 -10654,11852 -10655,11851 -10655,11829 -10658,11826 -10665,11826
VDD_3V3 on BOTTOM "BOTTOM-VDD_3V3 4" (solid, pour order 15): 17 vertices, not listed, extent -12425,9716 -12331,9764
N16757495 on BOTTOM "BOTTOM-N16757495" (solid, pour order 25): -12028,11992 -12054,11992 -12071,12009 -12073,12009 -12100,12009 -12106,12003 -12106,11956 -12099,11949 -12070,11949 -12053,11966 -12028,11966 -12020,11974 -12020,11984
GND on BOTTOM "BOTTOM-GND 11" (solid, pour order 80): -12844,12170 -12844,12204 -12855,12215 -12855,12293 -12867,12305 -12920,12305 -12930,12295 -12930,12172 -12920,12162 -12852,12162
VDDA_1V8 on BOTTOM "BOTTOM-VDDA_1V8" (solid, pour order 4): -12601,9790 -12618,9790 -12624,9796 -12679,9796 -12682,9793 -12682,9771 -12678,9767 -12651,9767 -12641,9777 -12623,9777 -12619,9781 -12601,9781 -12598,9784 -12598,9787
GND_EARTH on LAY4_PWR1 "LAY4_PWR1-GND_EARTH" (solid, pour order 136): 72 vertices, not listed, extent -12990,9233 -9864,9851
AVDD33 on LAY4_PWR1 "LAY4_PWR1-AVDD33" (solid, pour order 93): 18 vertices, not listed, extent -11354,11620 -11235,11901
VDDA_1V8_OLDI on LAY4_PWR1 "LAY4_PWR1-VDDA_1V8_OLDI" (solid, pour order 96): -12084,11393 -12044,11393 -12036,11401 -12036,11553 -12036,11592 -12047,11603 -12086,11603 -12115,11603 -12123,11595 -12123,11432
PHY_VDDIO on LAY4_PWR1 "LAY4_PWR1-PHY_VDDIO" (solid, pour order 99): -11759,11943 -11759,11775 -11739,11755 -11589,11755 -11583,11761 -11583,11791 -11589,11797 -11666,11797 -11696,11827 -11696,11975 -11710,11989 -11751,11989 -11759,11981
AVDD10 on LAY4_PWR1 "LAY4_PWR1-AVDD10" (solid, pour order 91): -11443,11884 -11417,11884 -11384,11884 -11289,11789 -11289,11723 -11330,11682 -11342,11682 -11361,11682 -11368,11689 -11368,11771 -11452,11855 -11452,11875
VDD_CORE on LAY4_PWR1 "LAY4_PWR1-VDD_CORE" (solid, pour order 127): 45 vertices, not listed, extent -12609,9866 -11906,11770
VSYS_5V on LAY4_PWR1 "LAY4_PWR1-VSYS_5V" (solid, pour order 139): 77 vertices, not listed, extent -12864,9348 -9996,12345
PHY_VDD1V0 on LAY4_PWR1 "LAY4_PWR1-PHY_VDD1V0" (solid, pour order 76): 19 vertices, not listed, extent -11632,11690 -11533,11940
HDMI_AVCC on LAY4_PWR1 "LAY4_PWR1-HDMI_AVCC" (solid, pour order 115): -11365,10505 -11318,10505 -11295,10482 -11256,10482 -11146,10372 -11146,10268 -11176,10238 -11525,10238 -11533,10246 -11533,10368 -11486,10415 -11399,10415 -11375,10439 -11375,10495
VDD_1V8 on LAY4_PWR1 "LAY4_PWR1-VDD_1V8" (solid, pour order 140): 71 vertices, not listed, extent -12891,10081 -10221,12263
GND on LAY4_PWR1 "LAY4_PWR1-GND" (solid, pour order 138): 30 vertices, not listed, extent -12971,9931 -11806,11860
GND on LAY4_PWR1 "LAY4_PWR1-GND 1" (solid, pour order 134): 21 vertices, not listed, extent -11825,10046 -9894,11874
VDD_3V3_SD on LAY4_PWR1 "LAY4_PWR1-VDD_3V3_SD" (solid, pour order 109): -10534,10920 -10534,10830 -10671,10693 -10788,10693 -10810,10715 -10810,10773 -10798,10785 -10735,10785 -10632,10888 -10632,10931 -10621,10942 -10556,10942
VDDA_PLL0 on LAY4_PWR1 "LAY4_PWR1-VDDA_PLL0" (solid, pour order 110): 20 vertices, not listed, extent -12255,11338 -12046,11637
VDD_1V2 on LAY5_PWR2 "LAY5_PWR2-VDD_1V2" (solid, pour order 137): 26 vertices, not listed, extent -12909,10076 -12067,11537
VDDA_0V85 on LAY5_PWR2 "LAY5_PWR2-VDDA_0V85" (solid, pour order 124): 38 vertices, not listed, extent -12688,9638 -11920,11354
VDD_3V3 on LAY5_PWR2 "LAY5_PWR2-VDD_3V3" (solid, pour order 142): 69 vertices, not listed, extent -12759,9537 -9903,12322
VDDA_1V8 on LAY5_PWR2 "LAY5_PWR2-VDDA_1V8" (solid, pour order 122): 25 vertices, not listed, extent -12688,9743 -12096,11177
GND_EARTH on LAY5_PWR2 "LAY5_PWR2-GND_EARTH" (solid, pour order 135): 72 vertices, not listed, extent -12990,9233 -9864,9847
VDDA_PLL1 on LAY5_PWR2 "LAY5_PWR2-VDDA_PLL1" (solid, pour order 94): 22 vertices, not listed, extent -11965,11301 -11693,11427
VDDA_1V8_CSIRX on LAY5_PWR2 "LAY5_PWR2-VDDA_1V8_CSIRX" (solid, pour order 82): -11968,11394 -11986,11394 -11994,11402 -11994,11456 -11999,11461 -11999,11610 -11978,11631 -11939,11631 -11930,11622 -11930,11602 -11946,11586 -11946,11416
VDD_2V5 on LAY5_PWR2 "LAY5_PWR2-VDD_2V5" (solid, pour order 119): -12985,10086 -12985,11016 -12973.82,11027.18 -12891.12,11027.12 -12880,11016 -12880,10774 -12915,10739 -12915,10181 -12799,10065 -12680,10065 -12661,10046 -12661,9832 -12669,9824 -12723,9824
VDD_1V8 on TOP "TOP-VDD_1V8" (solid, pour order 34): -12002,10804 -11968,10804 -11959,10795 -11959,10724 -11967,10716 -12001,10716 -12010,10725 -12010,10796
VDD_3V3 on TOP "TOP-VDD_3V3" (solid, pour order 10): -10601,12030 -10636,12030 -10643,12037 -10643,12070 -10637,12076 -10602,12076 -10596,12070 -10596,12035
USB_A_5V on TOP "TOP-USB_A_5V" (solid, pour order 95): -12096,9609 -12096,9781 -12080,9797 -12022,9797 -12008,9783 -12008,9612 -12026,9594 -12081,9594
VDD_CORE on TOP "TOP-VDD_CORE" (solid, pour order 5): -11987,11709 -11987,11752 -11972,11767 -11961,11767 -11956,11762 -11956,11728 -11962,11722 -11962,11708 -11968,11702 -11980,11702
VSYS_5V on TOP "TOP-VSYS_5V" (solid, pour order 101): -10545,11509 -10599,11509 -10612,11496 -10612,11386 -10625,11373 -10625,11278 -10625,11238 -10617,11230 -10568,11230 -10562,11236 -10562,11345 -10532,11375 -10532,11496
VDD_CANUART on TOP "TOP-VDD_CANUART" (solid, pour order 85): 18 vertices, not listed, extent -12178,10834 -12102,11145
VDD_3V3_SD on TOP "TOP-VDD_3V3_SD" (solid, pour order 40): -10617,10952 -10595,10952 -10588,10945 -10588,10927 -10570,10909 -10534,10909 -10514,10909 -10510,10905 -10510,10887 -10515,10882 -10622,10882 -10623,10883 -10623,10946
VDDA_1V8 on TOP "TOP-VDDA_1V8" (solid, pour order 121): 96 vertices, not listed, extent -12269,10490 -11263,11816
N16846143 on TOP "TOP-N16846143" (solid, pour order 7): -12823,12142 -12823,12175 -12835,12187 -12835,12213 -12829,12219 -12805,12219 -12801,12215 -12801,12183 -12809,12175 -12811,12175 -12812,12174 -12812,12140 -12814,12138 -12819,12138
VDD_1V2 on TOP "TOP-VDD_1V2" (solid, pour order 63): 18 vertices, not listed, extent -12907,10816 -12821,10950
VSYS_5V on TOP "TOP-VSYS_5V 1" (solid, pour order 37): -12192,10361 -12233,10361 -12244,10361 -12250,10355 -12250,10302 -12241,10293 -12232,10293 -12190,10293 -12182,10301 -12182,10351
VDD_1V8 on TOP "TOP-VDD_1V8 1" (solid, pour order 78): -12584,11980 -12663,11980 -12672,11971 -12726,11971 -12732,11977 -12732,12034 -12722,12044 -12595,12044 -12580,12029 -12580,11984
VDD_3V3 on TOP "TOP-VDD_3V3 1" (solid, pour order 19): -11334,12192 -11359,12192 -11369,12182 -11369,12126 -11364,12121 -11333,12121 -11325,12129 -11325,12183
GND on TOP "TOP-GND" (solid, pour order 98): -12865,12311 -12941,12311 -12956,12296 -12956,12171 -12927,12142 -12859,12142 -12850,12133 -12838,12133 -12833,12138 -12833,12149 -12833,12168 -12847,12182 -12847,12293
VDD_3V3 on TOP "TOP-VDD_3V3 2" (solid, pour order 8): -12339,9761 -12357,9761 -12366,9752 -12366,9713 -12359,9706 -12339,9706 -12331,9714 -12331,9753
GND on TOP "TOP-GND 1" (solid, pour order 69): -10663,12025 -10717,12025 -10732,12010 -10732,11908 -10711,11887 -10683,11887 -10676,11894 -10676,11906 -10664,11918 -10664,12003 -10658,12009 -10658,12020
N8504621 on TOP "TOP-N8504621" (solid, pour order 62): -10627,11869 -10661,11869 -10664,11872 -10664,11909 -10646,11927 -10646,12002 -10637,12011 -10605,12011 -10593,11999 -10593,11903
VDDA_1V8_MCU on TOP "TOP-VDDA_1V8_MCU" (solid, pour order 12): -12187,10631 -12187,10699 -12191,10703 -12212,10703 -12218,10697 -12218,10630 -12212,10624 -12194,10624
VDDA_1V8_USB on TOP "TOP-VDDA_1V8_USB" (solid, pour order 22): -12033,11616 -12033,11713 -12039,11719 -12055,11719 -12060,11714 -12060,11657 -12060,11634 -12069,11625 -12069,11611 -12065,11607 -12042,11607
VDDA_0V85 on TOP "TOP-VDDA_0V85" (solid, pour order 47): -12069,10684 -12077,10676 -12077,10570 -12062,10555 -12037,10555 -12030,10562 -12030,10674 -12030,10682 -12034,10686 -12067,10686
GND on TOP "TOP-GND 2" (solid, pour order 53): -12880,9495 -12880,9467 -12878,9465 -12867,9465 -12863,9469 -12863,9524 -12872,9533 -12872,9644 -12884,9656 -12905,9656 -12913,9648 -12913,9528
VDDA_PLL0 on TOP "TOP-VDDA_PLL0" (solid, pour order 27): -12232,11634 -12232,11685 -12225,11692 -12225,11715 -12222,11718 -12200,11718 -12195,11713 -12195,11623 -12207,11611 -12230,11611 -12239,11620 -12239,11627
MB_3V3 on TOP "TOP-MB_3V3" (solid, pour order 88): -10938,10838 -10965,10838 -10975,10828 -10975,10645 -10948,10618 -10882,10618 -10870,10630 -10870,10674 -10925,10729 -10925,10825
VSYS_5V on TOP "TOP-VSYS_5V 2" (solid, pour order 61): 29 vertices, not listed, extent -12863,9462 -12802,9637
GND_EARTH on TOP "TOP-GND_EARTH" (solid, pour order 129): 65 vertices, not listed, extent -12990,9233 -9890,9850
VDDA_1V8_OLDI on TOP "TOP-VDDA_1V8_OLDI" (solid, pour order 31): -12097,11582 -12129,11582 -12139,11592 -12139,11718 -12137,11720 -12120,11720 -12110,11710 -12110,11618 -12110,11610 -12094,11594 -12094,11585
VDD_3V3 on TOP "TOP-VDD_3V3 3" (solid, pour order 14): -12478,11848 -12506,11848 -12517,11859 -12517,11880 -12508,11889 -12444,11889 -12438,11883 -12438,11866 -12442,11862 -12464,11862
VDD_1V2 on TOP "TOP-VDD_1V2 1" (solid, pour order 30): -11645,10273 -11710,10273 -11721,10262 -11721,10230 -11711,10220 -11645,10220 -11639,10226 -11639,10267
GND on TOP "TOP-GND 3" (solid, pour order 54): 19 vertices, not listed, extent -12549,11760 -12442,11878
VDDA_CORE_USB on TOP "TOP-VDDA_CORE_USB" (solid, pour order 11): -12026,11715 -12026,11634 -12021,11629 -12009,11629 -12002,11636 -12002,11716 -12005,11719 -12022,11719
GND on TOP "TOP-GND 4" (solid, pour order 38): -11709,10191 -11709,10146 -11704,10141 -11649,10141 -11638,10152 -11638,10191 -11638,10201 -11643,10206 -11701,10206 -11709,10198
VSYS_5V on TOP "TOP-VSYS_5V 3" (solid, pour order 21): -12421,9796 -12369,9796 -12361,9788 -12361,9768 -12382,9747 -12420,9747 -12433,9760 -12433,9784
VSYS_5V on TOP "TOP-VSYS_5V 4" (solid, pour order 9): -12662,9475 -12662,9544 -12653,9553 -12644,9553 -12640,9549 -12640,9471 -12644,9467 -12654,9467
VDD_3V3 on TOP "TOP-VDD_3V3 4" (solid, pour order 70): -10837,10526 -10925,10526 -10937,10514 -10937,10461 -10928,10452 -10818,10452 -10811,10459 -10811,10500
VSYS_5V on TOP "TOP-VSYS_5V 5" (solid, pour order 42): -12479,9906 -12562,9906 -12570,9898 -12570,9862 -12559,9851 -12478,9851 -12470,9859 -12470,9897
GND on TOP "TOP-GND 5" (solid, pour order 144): 110 vertices, not listed, extent -12974,9283 -9864,12355
VDDA_1V8_CSIRX on TOP "TOP-VDDA_1V8_CSIRX" (solid, pour order 17): -11928,11614 -11928,11716 -11934,11722 -11950,11722 -11954,11718 -11954,11617 -11945,11608 -11934,11608
N17283785 on TOP "TOP-N17283785" (solid, pour order 112): -10936,11850 -10959,11850 -10975,11834 -10975,11741 -10997,11719 -10997,11602 -10954,11559 -10584,11559 -10545,11598 -10545,11642 -10566,11663 -10891,11663 -10926,11698 -10926,11840
VDD_CORE on TOP "TOP-VDD_CORE 1" (solid, pour order 64): -12187,10851 -12224,10851 -12240,10835 -12240,10725 -12233,10718 -12187,10718 -12177,10728 -12177,10841
PO_5V on TOP "TOP-PO_5V" (solid, pour order 105): 18 vertices, not listed, extent -10291,9965 -10071,10395
VDDA_PLL2 on TOP "TOP-VDDA_PLL2" (solid, pour order 41): -11608,11130 -11608,11140 -11603,11145 -11587,11145 -11582.5,11140.5 -11582.5,11100.5 -11528,11046 -11528,10987 -11548,10987 -11553,10992 -11553,11031 -11608,11086 -11608,11105
VDD_3V3 on TOP "TOP-VDD_3V3 5" (solid, pour order 43): -11880,10712 -11918,10712 -11928,10702 -11928,10629 -11912,10613 -11883,10613 -11871,10625 -11871,10703
GND on TOP "TOP-GND 6" (solid, pour order 50): -12925,10849 -12925,10976 -12934,10985 -12960,10985 -12970,10975 -12970,10849 -12960,10839 -12935,10839
VDD_CORE on TOP "TOP-VDD_CORE 2" (solid, pour order 16): -11816,11708 -11816,11754 -11828,11766 -11862,11766 -11876,11752 -11876,11734 -11869,11727 -11849,11727 -11843,11721 -11843,11707 -11837,11701 -11823,11701
VDDA_PLL1 on TOP "TOP-VDDA_PLL1" (solid, pour order 51): -11570,11288 -11645,11288 -11694,11337 -11694,11352 -11703,11361 -11723,11361 -11730,11354 -11730,11319 -11670,11259 -11570,11259 -11566,11263 -11566,11284
MCU_3V3 on LAY6 "LAY6-MCU_3V3" (solid, pour order 117): -10446,11537 -10432,11551 -10051,11551 -10029,11529 -10029,11381 -10039,11371 -10286,11371 -10355,11302 -10404,11253 -10432,11253 -10446,11267
VDDRF on LAY6 "LAY6-VDDRF" (solid, pour order 118): 20 vertices, not listed, extent -10399,11171 -9903,11645
VDDA_1V8 on LAY6 "LAY6-VDDA_1V8" (solid, pour order 113): 18 vertices, not listed, extent -12454,10468 -11649,10684
GND on LAY6 "LAY6-GND" (solid, pour order 141): 69 vertices, not listed, extent -12968,9688 -9877,12355
GND_EARTH on LAY6 "LAY6-GND_EARTH" (solid, pour order 132): 68 vertices, not listed, extent -12990,9233 -9890,9856
VDD_3V3 on LAY6 "LAY6-VDD_3V3" (solid, pour order 57): -11970,11121 -11986,11121 -12012,11147 -12067,11147 -12085,11165 -12085,11194 -12076,11203 -11989,11203 -11964,11178 -11964,11127
VDDA_1V8_USB on LAY6 "LAY6-VDDA_1V8_USB" (solid, pour order 71): -12031,11413 -12057,11413 -12062,11418 -12062,11438 -12043,11457 -12043,11473 -12073,11503 -12073,11621 -12067,11627 -12040,11627 -12031,11618 -12031,11524 -12009,11502 -12009,11435
VDD_CORE on LAY6 "LAY6-VDD_CORE" (solid, pour order 77): 20 vertices, not listed, extent -12109,11317 -11925,11396
VDD_1V8 on LAY6 "LAY6-VDD_1V8" (solid, pour order 125): 32 vertices, not listed, extent -12644,9729 -10557,10378
VDDA_CORE_USB on LAY6 "LAY6-VDDA_CORE_USB" (solid, pour order 87): 17 vertices, not listed, extent -12047,11375 -11953,11667
VDDA_1V8 on LAY6 "LAY6-VDDA_1V8 1" (solid, pour order 104): 23 vertices, not listed, extent -12125,11120 -11885,11318
VDD_CORE on LAY6 "LAY6-VDD_CORE 1" (solid, pour order 45): -11849,11730 -11980,11730 -11988,11738 -11988,11760 -11977,11771 -11848,11771 -11841,11764 -11841,11738
VDD_1V2 on LAY6 "LAY6-VDD_1V2" (solid, pour order 120): -11681,10274 -12580,10274 -12701,10153 -12761,10153 -12769,10145 -12769,10091 -12754,10076 -12414,10076 -12344,10146 -11684,10146 -11671,10159 -11671,10264
VPP_1V8 on LYR3 "LYR3-VPP_1V8" (solid, pour order 114): 25 vertices, not listed, extent -12441,10309 -12079,11211
GND on LYR3 "LYR3-GND" (solid, pour order 126): -10043,11504 -10306,11504 -10336,11474 -10336,11221 -10427,11130 -10427,10985 -10427,10972 -10387,10932 -10387,10727 -10416,10698 -10416,10641 -10401,10626 -10016,10626 -9954,10688 -9954,11415
VDDA_PLL2 on LYR3 "LYR3-VDDA_PLL2" (solid, pour order 107): -11797,11190 -11958,11190 -11989,11221 -11989,11271 -11982,11278 -11787,11278 -11653,11144 -11594,11144 -11585,11135 -11585,11108 -11589,11104 -11711,11104
VDDA_1V8_MCU on LYR3 "LYR3-VDDA_1V8_MCU" (solid, pour order 108): 23 vertices, not listed, extent -12220,10668 -12000,11238
N17232817 on LYR3 "LYR3-N17232817" (solid, pour order 68): 21 vertices, not listed, extent -11254,10189 -11143,10356
VDD_3V3 on LYR3 "LYR3-VDD_3V3" (solid, pour order 106): -12335,9723 -12580,9723 -12637,9780 -12637,9817 -12622,9832 -12369,9832 -12326,9789 -12326,9732
VDDSHV5 on LYR3 "LYR3-VDDSHV5" (solid, pour order 92): 19 vertices, not listed, extent -11925,10887 -11782,11138